# EAGLE board solder_test (EAGLE 7.1.0)
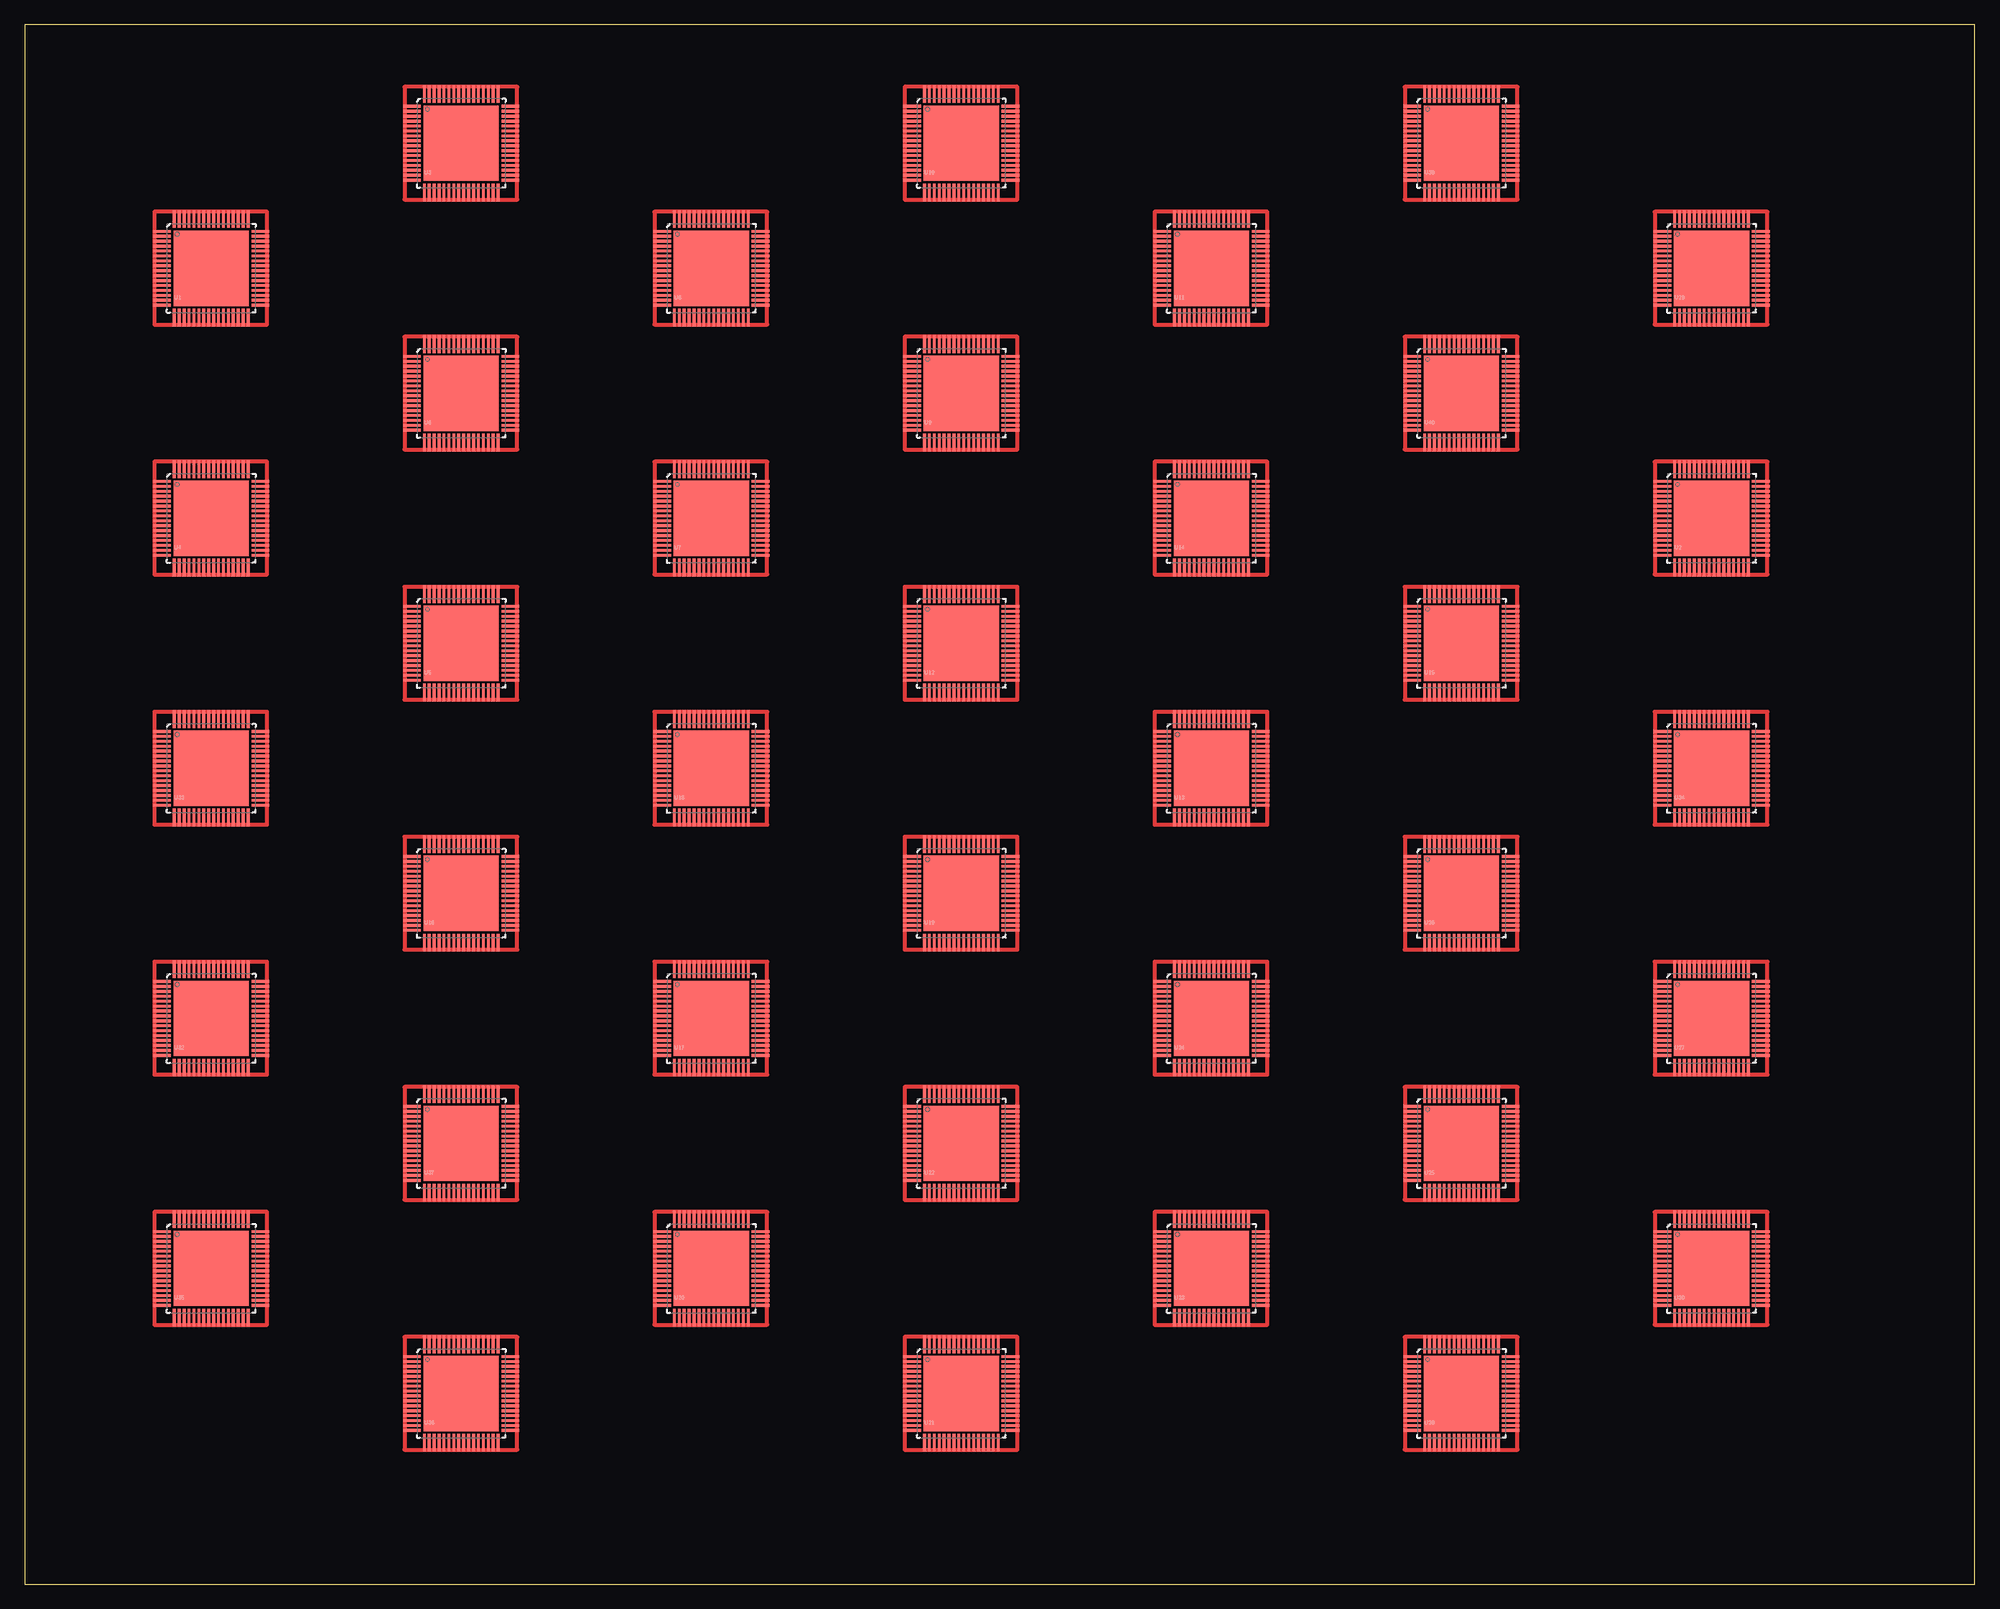
[diagram p0: board, top side]
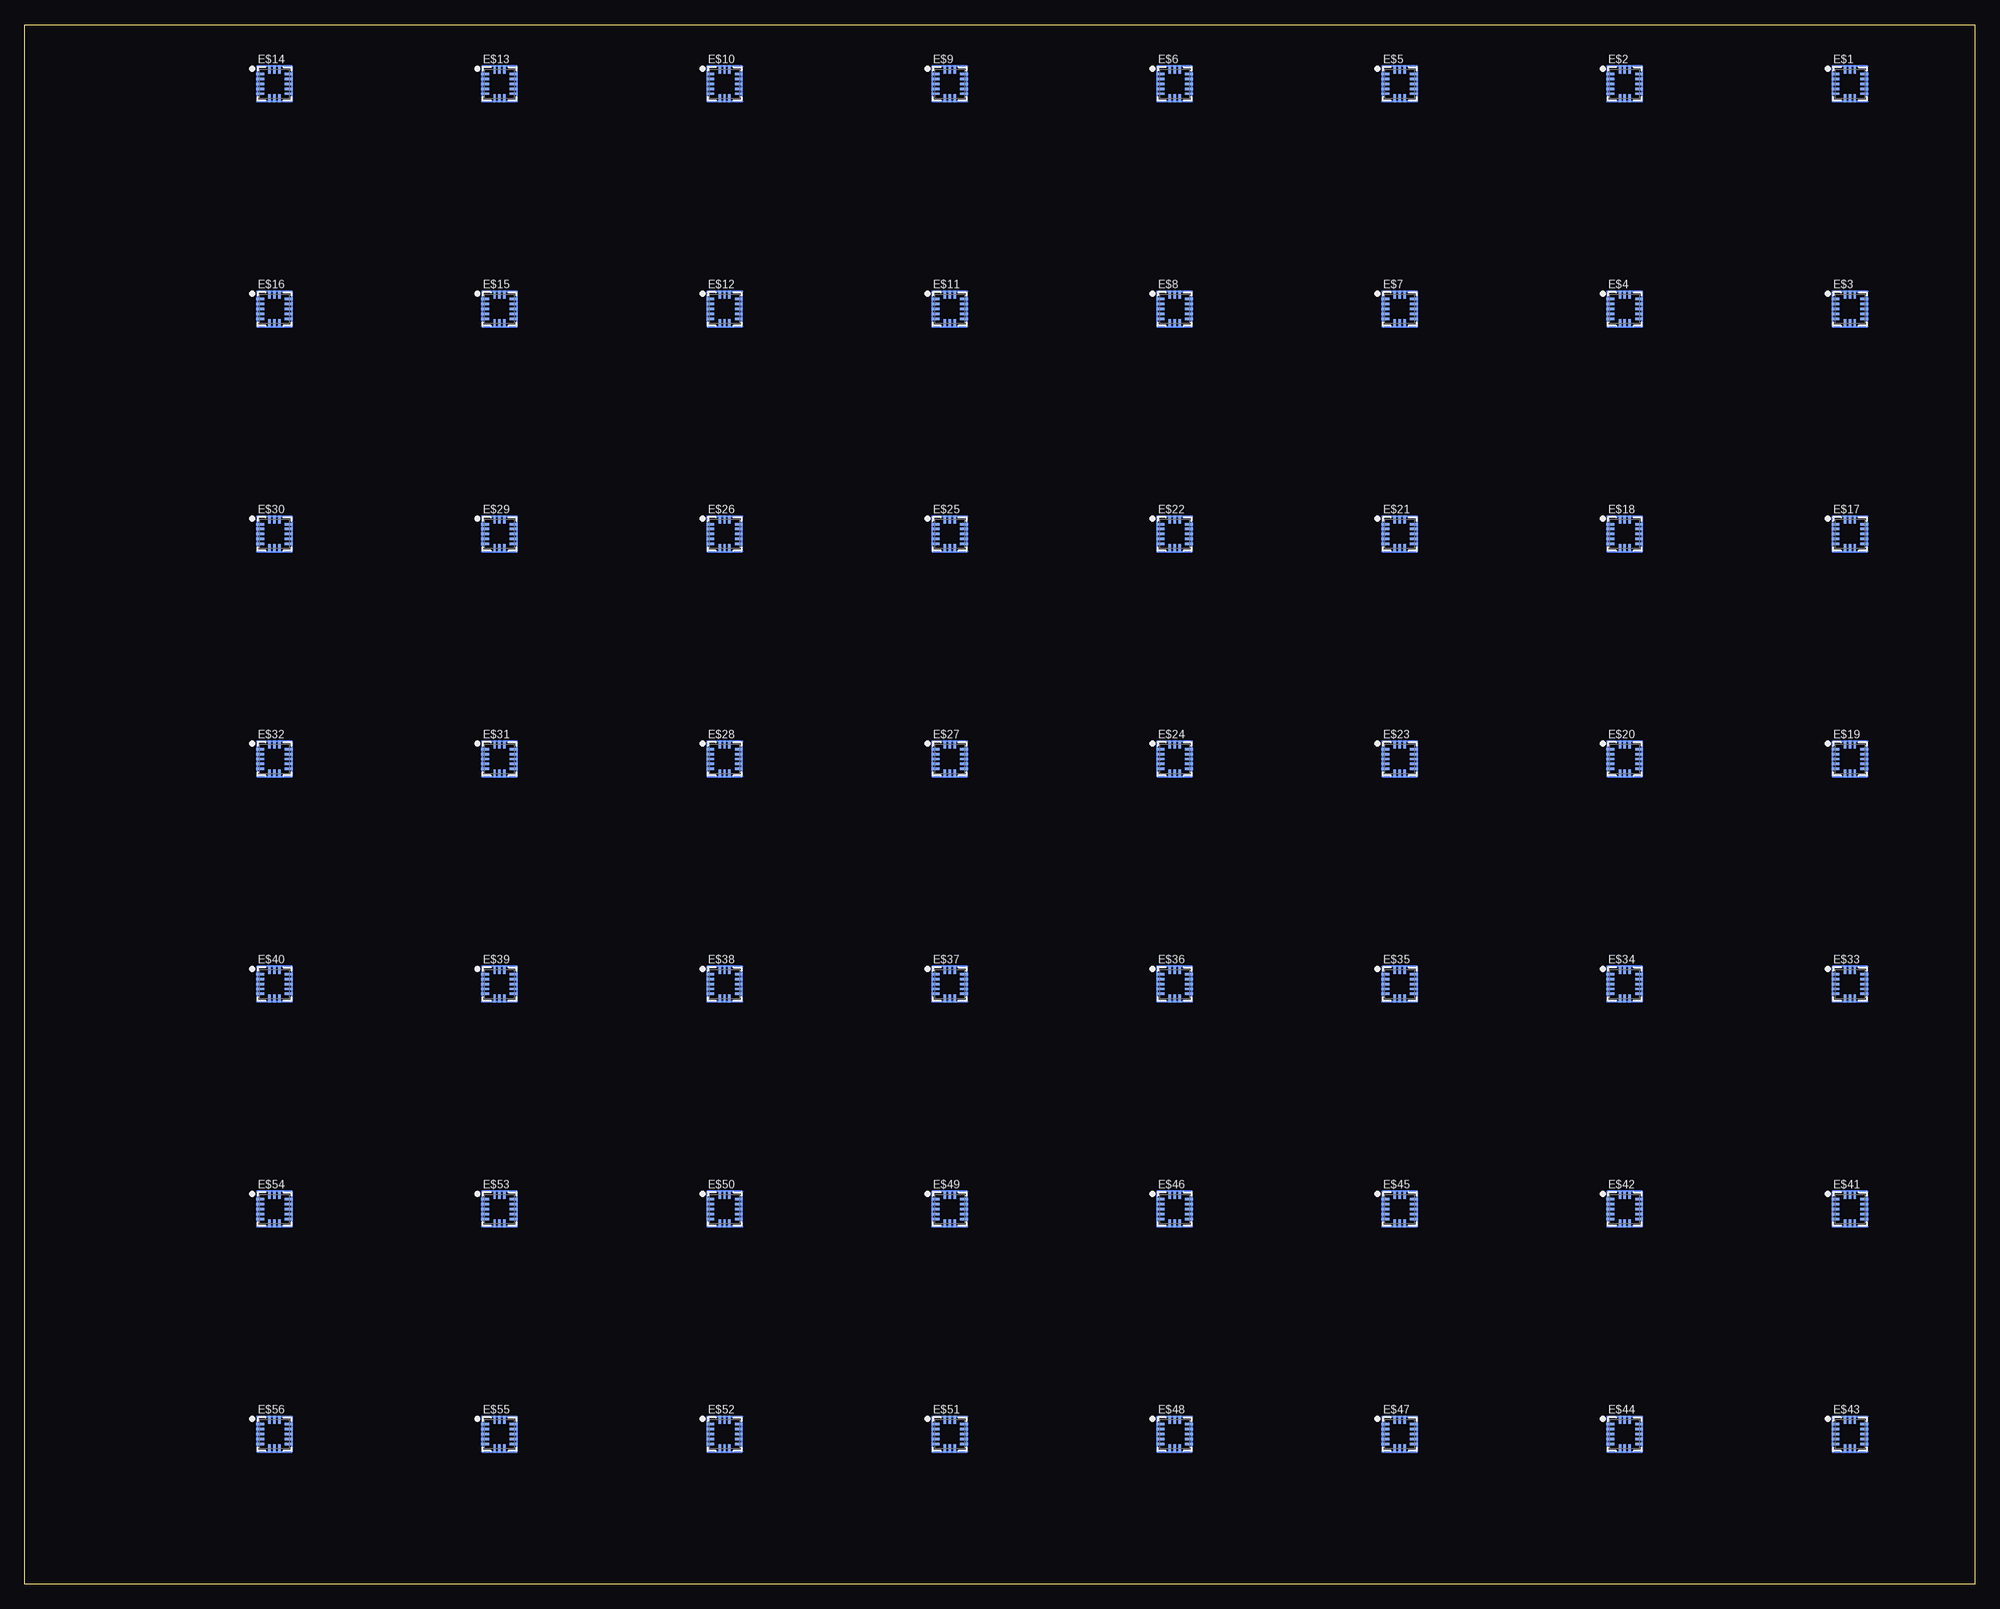
[diagram p1: board, bottom side, seen from below]

Size 198.1 x 158.42 mm. Coordinates in mm from the lower left corner, seen from the top.
Outline: 0,0 198.1,0 198.1,158.42 0,158.42 0,0
Copper layers (1*16): Top 0.035mm / dielectric 1.5mm / Bottom 0.035mm
Design rules "default *": minimum track width 10mil, minimum drill 24mil, track to track 8mil, track to pad 8mil, pad to pad 8mil, via to via 8mil, smd to smd 8mil, copper to edge 40mil, drill to drill 8mil, minimum pad ring 10mil, minimum via ring 8mil, stop-mask expansion 4mil, vias tented up to drill 0mil, thermal gap 10mil
Net classes: 1 RFSIG: width 0.457 mm; 2 VBATT: width 0.762 mm; 3 VMOTOR: width 0.254 mm; 4 GND: width 0.254 mm

## Footprints (pad centres in the part's own frame; a part is rotated, then mirrored left to right if it is on the bottom)
LGA16_3X3MM = smd 0.8 x 0.25: 1 -1.45,1; 2 -1.45,0.5; 3 -1.45,0; 4 -1.45,-0.5; 5 -1.45,-1; 9 1.45,-1; 10 1.45,-0.5; 11 1.45,0; 12 1.45,0.5; 13 1.45,1 | smd 0.25 x 0.8: 6 -0.5,-1.45; 7 0,-1.45; 8 0.5,-1.45; 14 0.5,1.45; 15 0,1.45; 16 -0.5,1.45
QFN-64 = smd 1.8 x 0.28: 1 -5,3.75; 2 -5,3.25; 3 -5,2.75; 4 -5,2.25; 5 -5,1.75; 6 -5,1.25; 7 -5,0.75; 8 -5,0.25; 9 -5,-0.25; 10 -5,-0.75; 11 -5,-1.25; 12 -5,-1.75; 13 -5,-2.25; 14 -5,-2.75; 15 -5,-3.25; 16 -5,-3.75; 33 5,-3.75; 34 5,-3.25; 35 5,-2.75; 36 5,-2.25; 37 5,-1.75; 38 5,-1.25; 39 5,-0.75; 40 5,-0.25; 41 5,0.25; 42 5,0.75; 43 5,1.25; 44 5,1.75; 45 5,2.25; 46 5,2.75; 47 5,3.25; 48 5,3.75 | smd 0.28 x 1.8: 17 -3.75,-5; 18 -3.25,-5; 19 -2.75,-5; 20 -2.25,-5; 21 -1.75,-5; 22 -1.25,-5; 23 -0.75,-5; 24 -0.25,-5; 25 0.25,-5; 26 0.75,-5; 27 1.25,-5; 28 1.75,-5; 29 2.25,-5; 30 2.75,-5; 31 3.25,-5; 32 3.75,-5; 49 3.75,5; 50 3.25,5; 51 2.75,5; 52 2.25,5; 53 1.75,5; 54 1.25,5; 55 0.75,5; 56 0.25,5; 57 -0.25,5; 58 -0.75,5; 59 -1.25,5; 60 -1.75,5; 61 -2.25,5; 62 -2.75,5; 63 -3.25,5; 64 -3.75,5 | smd 7.65 x 7.65: 65 0,0

## Placement (x,y rotation side)
E$1  [LGA16_3X3MM]  12.7,152.4 0 bottom
E$2  [LGA16_3X3MM]  35.56,152.4 0 bottom
E$3  [LGA16_3X3MM]  12.7,129.54 0 bottom
E$4  [LGA16_3X3MM]  35.56,129.54 0 bottom
E$5  [LGA16_3X3MM]  58.42,152.4 0 bottom
E$6  [LGA16_3X3MM]  81.28,152.4 0 bottom
E$7  [LGA16_3X3MM]  58.42,129.54 0 bottom
E$8  [LGA16_3X3MM]  81.28,129.54 0 bottom
E$9  [LGA16_3X3MM]  104.14,152.4 0 bottom
E$10  [LGA16_3X3MM]  127,152.4 0 bottom
E$11  [LGA16_3X3MM]  104.14,129.54 0 bottom
E$12  [LGA16_3X3MM]  127,129.54 0 bottom
E$13  [LGA16_3X3MM]  149.86,152.4 0 bottom
E$14  [LGA16_3X3MM]  172.72,152.4 0 bottom
E$15  [LGA16_3X3MM]  149.86,129.54 0 bottom
E$16  [LGA16_3X3MM]  172.72,129.54 0 bottom
E$17  [LGA16_3X3MM]  12.7,106.68 0 bottom
E$18  [LGA16_3X3MM]  35.56,106.68 0 bottom
E$19  [LGA16_3X3MM]  12.7,83.82 0 bottom
E$20  [LGA16_3X3MM]  35.56,83.82 0 bottom
E$21  [LGA16_3X3MM]  58.42,106.68 0 bottom
E$22  [LGA16_3X3MM]  81.28,106.68 0 bottom
E$23  [LGA16_3X3MM]  58.42,83.82 0 bottom
E$24  [LGA16_3X3MM]  81.28,83.82 0 bottom
E$25  [LGA16_3X3MM]  104.14,106.68 0 bottom
E$26  [LGA16_3X3MM]  127,106.68 0 bottom
E$27  [LGA16_3X3MM]  104.14,83.82 0 bottom
E$28  [LGA16_3X3MM]  127,83.82 0 bottom
E$29  [LGA16_3X3MM]  149.86,106.68 0 bottom
E$30  [LGA16_3X3MM]  172.72,106.68 0 bottom
E$31  [LGA16_3X3MM]  149.86,83.82 0 bottom
E$32  [LGA16_3X3MM]  172.72,83.82 0 bottom
E$33  [LGA16_3X3MM]  12.7,60.96 0 bottom
E$34  [LGA16_3X3MM]  35.56,60.96 0 bottom
E$35  [LGA16_3X3MM]  58.42,60.96 0 bottom
E$36  [LGA16_3X3MM]  81.28,60.96 0 bottom
E$37  [LGA16_3X3MM]  104.14,60.96 0 bottom
E$38  [LGA16_3X3MM]  127,60.96 0 bottom
E$39  [LGA16_3X3MM]  149.86,60.96 0 bottom
E$40  [LGA16_3X3MM]  172.72,60.96 0 bottom
E$41  [LGA16_3X3MM]  12.7,38.1 0 bottom
E$42  [LGA16_3X3MM]  35.56,38.1 0 bottom
E$43  [LGA16_3X3MM]  12.7,15.24 0 bottom
E$44  [LGA16_3X3MM]  35.56,15.24 0 bottom
E$45  [LGA16_3X3MM]  58.42,38.1 0 bottom
E$46  [LGA16_3X3MM]  81.28,38.1 0 bottom
E$47  [LGA16_3X3MM]  58.42,15.24 0 bottom
E$48  [LGA16_3X3MM]  81.28,15.24 0 bottom
E$49  [LGA16_3X3MM]  104.14,38.1 0 bottom
E$50  [LGA16_3X3MM]  127,38.1 0 bottom
E$51  [LGA16_3X3MM]  104.14,15.24 0 bottom
E$52  [LGA16_3X3MM]  127,15.24 0 bottom
E$53  [LGA16_3X3MM]  149.86,38.1 0 bottom
E$54  [LGA16_3X3MM]  172.72,38.1 0 bottom
E$55  [LGA16_3X3MM]  149.86,15.24 0 bottom
E$56  [LGA16_3X3MM]  172.72,15.24 0 bottom
U1  ATMEGA128RFA1  [QFN-64]  18.95,133.67 0 top
U2  ATMEGA128RFA1  [QFN-64]  171.35,108.27 0 top
U3  ATMEGA128RFA1  [QFN-64]  44.35,146.37 0 top
U4  ATMEGA128RFA1  [QFN-64]  18.95,108.27 0 top
U5  ATMEGA128RFA1  [QFN-64]  44.35,95.57 0 top
U6  ATMEGA128RFA1  [QFN-64]  44.35,120.97 0 top
U7  ATMEGA128RFA1  [QFN-64]  69.75,108.27 0 top
U8  ATMEGA128RFA1  [QFN-64]  69.75,133.67 0 top
U9  ATMEGA128RFA1  [QFN-64]  95.15,120.97 0 top
U10  ATMEGA128RFA1  [QFN-64]  95.15,146.37 0 top
U11  ATMEGA128RFA1  [QFN-64]  120.55,133.67 0 top
U12  ATMEGA128RFA1  [QFN-64]  95.15,95.57 0 top
U13  ATMEGA128RFA1  [QFN-64]  120.55,82.87 0 top
U14  ATMEGA128RFA1  [QFN-64]  120.55,108.27 0 top
U15  ATMEGA128RFA1  [QFN-64]  145.95,95.57 0 top
U16  ATMEGA128RFA1  [QFN-64]  44.35,70.17 0 top
U17  ATMEGA128RFA1  [QFN-64]  69.75,57.47 0 top
U18  ATMEGA128RFA1  [QFN-64]  69.75,82.87 0 top
U19  ATMEGA128RFA1  [QFN-64]  95.15,70.17 0 top
U20  ATMEGA128RFA1  [QFN-64]  69.75,32.07 0 top
U21  ATMEGA128RFA1  [QFN-64]  95.15,19.37 0 top
U22  ATMEGA128RFA1  [QFN-64]  95.15,44.77 0 top
U23  ATMEGA128RFA1  [QFN-64]  120.55,32.07 0 top
U24  ATMEGA128RFA1  [QFN-64]  120.55,57.47 0 top
U25  ATMEGA128RFA1  [QFN-64]  145.95,44.77 0 top
U26  ATMEGA128RFA1  [QFN-64]  145.95,70.17 0 top
U27  ATMEGA128RFA1  [QFN-64]  171.35,57.47 0 top
U28  ATMEGA128RFA1  [QFN-64]  145.95,19.37 0 top
U29  ATMEGA128RFA1  [QFN-64]  171.35,133.67 0 top
U30  ATMEGA128RFA1  [QFN-64]  171.35,32.07 0 top
U32  ATMEGA128RFA1  [QFN-64]  18.95,57.47 0 top
U33  ATMEGA128RFA1  [QFN-64]  18.95,82.87 0 top
U34  ATMEGA128RFA1  [QFN-64]  171.35,82.87 0 top
U35  ATMEGA128RFA1  [QFN-64]  18.95,32.07 0 top
U36  ATMEGA128RFA1  [QFN-64]  44.35,19.37 0 top
U37  ATMEGA128RFA1  [QFN-64]  44.35,44.77 0 top
U39  ATMEGA128RFA1  [QFN-64]  145.95,146.37 0 top
U40  ATMEGA128RFA1  [QFN-64]  145.95,120.97 0 top

## Library data of the parts
E$1-E$56 = IMU_parts
U1-U30 U32-U37 U39 U40 = SparkFun-DigitalIC

## Nets
N$1: U1.36
N$2: U1.37
N$3: U1.39
N$4: U1.40
N$5: U1.41
N$6: U1.42
N$7: U1.43
N$8: U1.25
N$9: U1.26
N$10: U1.27
N$11: U1.28
N$12: U1.29
N$13: U1.30
N$14: U1.31
N$15: U1.32
N$16: U1.46
N$17: U1.47
N$18: U1.48
N$19: U1.49
N$20: U1.50
N$21: U1.51
N$22: U1.52
N$23: U1.53
N$24: U1.14
N$25: U1.15
N$26: U1.16
N$27: U1.59
N$28: U1.12
N$29: U1.13
N$30: U1.8
N$31: U1.9
N$32: U1.7
N$33: U1.10
N$34: U1.60
N$35: U1.57
N$36: U1.56
N$37: U1.33
N$38: U1.62
N$39: U1.63
N$40: U1.64
N$41: U1.1
N$42: U1.2
N$43: U1.3
N$44: U1.4
N$45: U1.5
N$46: U1.6
N$47: U1.65
N$48: U1.19
N$49: U1.18
N$50: U1.17
N$51: U2.36
N$52: U2.37
N$53: U2.39
N$54: U2.40
N$55: U2.41
N$56: U2.42
N$57: U2.43
N$58: U2.25
N$59: U2.26
N$60: U2.27
N$61: U2.28
N$62: U2.29
N$63: U2.30
N$64: U2.31
N$65: U2.32
N$66: U2.46
N$67: U2.47
N$68: U2.48
N$69: U2.49
N$70: U2.50
N$71: U2.51
N$72: U2.52
N$73: U2.53
N$74: U2.14
N$75: U2.15
N$76: U2.16
N$77: U2.59
N$78: U2.12
N$79: U2.13
N$80: U2.8
N$81: U2.9
N$82: U2.7
N$83: U2.10
N$84: U2.60
N$85: U2.57
N$86: U2.56
N$87: U2.33
N$88: U2.62
N$89: U2.63
N$90: U2.64
N$91: U2.1
N$92: U2.2
N$93: U2.3
N$94: U2.4
N$95: U2.5
N$96: U2.6
N$97: U2.65
N$98: U2.19
N$99: U2.18
N$100: U2.17
N$101: U3.36
N$102: U3.37
N$103: U3.39
N$104: U3.40
N$105: U3.41
N$106: U3.42
N$107: U3.43
N$108: U3.25
N$109: U3.26
N$110: U3.27
N$111: U3.28
N$112: U3.29
N$113: U3.30
N$114: U3.31
N$115: U3.32
N$116: U3.46
N$117: U3.47
N$118: U3.48
N$119: U3.49
N$120: U3.50
N$121: U3.51
N$122: U3.52
N$123: U3.53
N$124: U3.14
N$125: U3.15
N$126: U3.16
N$127: U3.59
N$128: U3.12
N$129: U3.13
N$130: U3.8
N$131: U3.9
N$132: U3.7
N$133: U3.10
N$134: U3.60
N$135: U3.57
N$136: U3.56
N$137: U3.33
N$138: U3.62
N$139: U3.63
N$140: U3.64
N$141: U3.1
N$142: U3.2
N$143: U3.3
N$144: U3.4
N$145: U3.5
N$146: U3.6
N$147: U3.65
N$148: U3.19
N$149: U3.18
N$150: U3.17
N$151: U4.36
N$152: U4.37
N$153: U4.39
N$154: U4.40
N$155: U4.41
N$156: U4.42
N$157: U4.43
N$158: U4.25
N$159: U4.26
N$160: U4.27
N$161: U4.28
N$162: U4.29
N$163: U4.30
N$164: U4.31
N$165: U4.32
N$166: U4.46
N$167: U4.47
N$168: U4.48
N$169: U4.49
N$170: U4.50
N$171: U4.51
N$172: U4.52
N$173: U4.53
N$174: U4.14
N$175: U4.15
N$176: U4.16
N$177: U4.59
N$178: U4.12
N$179: U4.13
N$180: U4.8
N$181: U4.9
N$182: U4.7
N$183: U4.10
N$184: U4.60
N$185: U4.57
N$186: U4.56
N$187: U4.33
N$188: U4.62
N$189: U4.63
N$190: U4.64
N$191: U4.1
N$192: U4.2
N$193: U4.3
N$194: U4.4
N$195: U4.5
N$196: U4.6
N$197: U4.65
N$198: U4.19
N$199: U4.18
N$200: U4.17
N$201: U5.36
N$202: U5.37
N$203: U5.39
N$204: U5.40
N$205: U5.41
N$206: U5.42
N$207: U5.43
N$208: U5.25
N$209: U5.26
N$210: U5.27
N$211: U5.28
N$212: U5.29
N$213: U5.30
N$214: U5.31
N$215: U5.32
N$216: U5.46
N$217: U5.47
N$218: U5.48
N$219: U5.49
N$220: U5.50
N$221: U5.51
N$222: U5.52
N$223: U5.53
N$224: U5.14
N$225: U5.15
N$226: U5.16
N$227: U5.59
N$228: U5.12
N$229: U5.13
N$230: U5.8
N$231: U5.9
N$232: U5.7
N$233: U5.10
N$234: U5.60
N$235: U5.57
N$236: U5.56
N$237: U5.33
N$238: U5.62
N$239: U5.63
N$240: U5.64
N$241: U5.1
N$242: U5.2
N$243: U5.3
N$244: U5.4
N$245: U5.5
N$246: U5.6
N$247: U5.65
N$248: U5.19
N$249: U5.18
N$250: U5.17
N$251: U6.36
N$252: U6.37
N$253: U6.39
N$254: U6.40
N$255: U6.41
N$256: U6.42
N$257: U6.43
N$258: U6.25
N$259: U6.26
N$260: U6.27
N$261: U6.28
N$262: U6.29
N$263: U6.30
N$264: U6.31
N$265: U6.32
N$266: U6.46
N$267: U6.47
N$268: U6.48
N$269: U6.49
N$270: U6.50
N$271: U6.51
N$272: U6.52
N$273: U6.53
N$274: U6.14
N$275: U6.15
N$276: U6.16
N$277: U6.59
N$278: U6.12
N$279: U6.13
N$280: U6.8
N$281: U6.9
N$282: U6.7
N$283: U6.10
N$284: U6.60
N$285: U6.57
N$286: U6.56
N$287: U6.33
N$288: U6.62
N$289: U6.63
N$290: U6.64
N$291: U6.1
N$292: U6.2
N$293: U6.3
N$294: U6.4
N$295: U6.5
N$296: U6.6
N$297: U6.65
N$298: U6.19
N$299: U6.18
N$300: U6.17
N$301: U7.36
N$302: U7.37
N$303: U7.39
N$304: U7.40
N$305: U7.41
N$306: U7.42
N$307: U7.43
N$308: U7.25
N$309: U7.26
N$310: U7.27
N$311: U7.28
N$312: U7.29
N$313: U7.30
N$314: U7.31
N$315: U7.32
N$316: U7.46
N$317: U7.47
N$318: U7.48
N$319: U7.49
N$320: U7.50
N$321: U7.51
N$322: U7.52
N$323: U7.53
N$324: U7.14
N$325: U7.15
N$326: U7.16
N$327: U7.59
N$328: U7.12
N$329: U7.13
N$330: U7.8
N$331: U7.9
N$332: U7.7
N$333: U7.10
N$334: U7.60
N$335: U7.57
N$336: U7.56
N$337: U7.33
N$338: U7.62
N$339: U7.63
N$340: U7.64
N$341: U7.1
N$342: U7.2
N$343: U7.3
N$344: U7.4
N$345: U7.5
N$346: U7.6
N$347: U7.65
N$348: U7.19
N$349: U7.18
N$350: U7.17
N$351: U8.36
N$352: U8.37
N$353: U8.39
N$354: U8.40
N$355: U8.41
N$356: U8.42
N$357: U8.43
N$358: U8.25
N$359: U8.26
N$360: U8.27
N$361: U8.28
N$362: U8.29
N$363: U8.30
N$364: U8.31
N$365: U8.32
N$366: U8.46
N$367: U8.47
N$368: U8.48
N$369: U8.49
N$370: U8.50
N$371: U8.51
N$372: U8.52
N$373: U8.53
N$374: U8.14
N$375: U8.15
N$376: U8.16
N$377: U8.59
N$378: U8.12
N$379: U8.13
N$380: U8.8
N$381: U8.9
N$382: U8.7
N$383: U8.10
N$384: U8.60
N$385: U8.57
N$386: U8.56
N$387: U8.33
N$388: U8.62
N$389: U8.63
N$390: U8.64
N$391: U8.1
N$392: U8.2
N$393: U8.3
N$394: U8.4
N$395: U8.5
N$396: U8.6
N$397: U8.65
N$398: U8.19
N$399: U8.18
N$400: U8.17
N$401: U9.36
N$402: U9.37
N$403: U9.39
N$404: U9.40
N$405: U9.41
N$406: U9.42
N$407: U9.43
N$408: U9.25
N$409: U9.26
N$410: U9.27
N$411: U9.28
N$412: U9.29
N$413: U9.30
N$414: U9.31
N$415: U9.32
N$416: U9.46
N$417: U9.47
N$418: U9.48
N$419: U9.49
N$420: U9.50
N$421: U9.51
N$422: U9.52
N$423: U9.53
N$424: U9.14
N$425: U9.15
N$426: U9.16
N$427: U9.59
N$428: U9.12
N$429: U9.13
N$430: U9.8
N$431: U9.9
N$432: U9.7
N$433: U9.10
N$434: U9.60
N$435: U9.57
N$436: U9.56
N$437: U9.33
N$438: U9.62
N$439: U9.63
N$440: U9.64
N$441: U9.1
N$442: U9.2
N$443: U9.3
N$444: U9.4
N$445: U9.5
N$446: U9.6
N$447: U9.65
N$448: U9.19
N$449: U9.18
N$450: U9.17
N$451: U10.36
N$452: U10.37
N$453: U10.39
N$454: U10.40
N$455: U10.41
N$456: U10.42
N$457: U10.43
N$458: U10.25
N$459: U10.26
N$460: U10.27
N$461: U10.28
N$462: U10.29
N$463: U10.30
N$464: U10.31
N$465: U10.32
N$466: U10.46
N$467: U10.47
N$468: U10.48
N$469: U10.49
N$470: U10.50
N$471: U10.51
N$472: U10.52
N$473: U10.53
N$474: U10.14
N$475: U10.15
N$476: U10.16
N$477: U10.59
N$478: U10.12
N$479: U10.13
N$480: U10.8
N$481: U10.9
N$482: U10.7
N$483: U10.10
N$484: U10.60
N$485: U10.57
N$486: U10.56
N$487: U10.33
N$488: U10.62
N$489: U10.63
N$490: U10.64
N$491: U10.1
N$492: U10.2
N$493: U10.3
N$494: U10.4
N$495: U10.5
N$496: U10.6
N$497: U10.65
N$498: U10.19
N$499: U10.18
N$500: U10.17
N$501: U11.36
N$502: U11.37
N$503: U11.39
N$504: U11.40
N$505: U11.41
N$506: U11.42
N$507: U11.43
N$508: U11.25
N$509: U11.26
N$510: U11.27
N$511: U11.28
N$512: U11.29
N$513: U11.30
N$514: U11.31
N$515: U11.32
N$516: U11.46
N$517: U11.47
N$518: U11.48
N$519: U11.49
N$520: U11.50
N$521: U11.51
N$522: U11.52
N$523: U11.53
N$524: U11.14
N$525: U11.15
N$526: U11.16
N$527: U11.59
N$528: U11.12
N$529: U11.13
N$530: U11.8
N$531: U11.9
N$532: U11.7
N$533: U11.10
N$534: U11.60
N$535: U11.57
N$536: U11.56
N$537: U11.33
N$538: U11.62
N$539: U11.63
N$540: U11.64
N$541: U11.1
N$542: U11.2
N$543: U11.3
N$544: U11.4
N$545: U11.5
N$546: U11.6
N$547: U11.65
N$548: U11.19
N$549: U11.18
N$550: U11.17
N$551: U12.36
N$552: U12.37
N$553: U12.39
N$554: U12.40
N$555: U12.41
N$556: U12.42
N$557: U12.43
N$558: U12.25
N$559: U12.26
N$560: U12.27
N$561: U12.28
N$562: U12.29
N$563: U12.30
N$564: U12.31
N$565: U12.32
N$566: U12.46
N$567: U12.47
N$568: U12.48
N$569: U12.49
N$570: U12.50
N$571: U12.51
N$572: U12.52
N$573: U12.53
N$574: U12.14
N$575: U12.15
N$576: U12.16
N$577: U12.59
N$578: U12.12
N$579: U12.13
N$580: U12.8
N$581: U12.9
N$582: U12.7
N$583: U12.10
N$584: U12.60
N$585: U12.57
N$586: U12.56
N$587: U12.33
N$588: U12.62
N$589: U12.63
N$590: U12.64
N$591: U12.1
N$592: U12.2
N$593: U12.3
N$594: U12.4
N$595: U12.5
N$596: U12.6
N$597: U12.65
N$598: U12.19
N$599: U12.18
N$600: U12.17
N$601: U13.36
N$602: U13.37
N$603: U13.39
N$604: U13.40
N$605: U13.41
N$606: U13.42
N$607: U13.43
N$608: U13.25
N$609: U13.26
N$610: U13.27
N$611: U13.28
N$612: U13.29
N$613: U13.30
N$614: U13.31
N$615: U13.32
N$616: U13.46
N$617: U13.47
N$618: U13.48
N$619: U13.49
N$620: U13.50
N$621: U13.51
N$622: U13.52
N$623: U13.53
N$624: U13.14
N$625: U13.15
N$626: U13.16
N$627: U13.59
N$628: U13.12
N$629: U13.13
N$630: U13.8
N$631: U13.9
N$632: U13.7
N$633: U13.10
N$634: U13.60
N$635: U13.57
N$636: U13.56
N$637: U13.33
N$638: U13.62
N$639: U13.63
N$640: U13.64
N$641: U13.1
N$642: U13.2
N$643: U13.3
N$644: U13.4
N$645: U13.5
N$646: U13.6
N$647: U13.65
N$648: U13.19
N$649: U13.18
N$650: U13.17
N$651: U14.36
N$652: U14.37
N$653: U14.39
N$654: U14.40
N$655: U14.41
N$656: U14.42
N$657: U14.43
N$658: U14.25
N$659: U14.26
N$660: U14.27
N$661: U14.28
N$662: U14.29
N$663: U14.30
N$664: U14.31
N$665: U14.32
N$666: U14.46
N$667: U14.47
N$668: U14.48
N$669: U14.49
N$670: U14.50
N$671: U14.51
N$672: U14.52
N$673: U14.53
N$674: U14.14
N$675: U14.15
N$676: U14.16
N$677: U14.59
N$678: U14.12
N$679: U14.13
N$680: U14.8
N$681: U14.9
N$682: U14.7
N$683: U14.10
N$684: U14.60
N$685: U14.57
N$686: U14.56
N$687: U14.33
N$688: U14.62
N$689: U14.63
N$690: U14.64
N$691: U14.1
N$692: U14.2
N$693: U14.3
N$694: U14.4
N$695: U14.5
N$696: U14.6
N$697: U14.65
N$698: U14.19
N$699: U14.18
N$700: U14.17
N$701: U15.36
N$702: U15.37
N$703: U15.39
N$704: U15.40
N$705: U15.41
N$706: U15.42
N$707: U15.43
N$708: U15.25
N$709: U15.26
N$710: U15.27
N$711: U15.28
N$712: U15.29
N$713: U15.30
N$714: U15.31
N$715: U15.32
N$716: U15.46
N$717: U15.47
N$718: U15.48
N$719: U15.49
N$720: U15.50
N$721: U15.51
N$722: U15.52
N$723: U15.53
N$724: U15.14
N$725: U15.15
N$726: U15.16
N$727: U15.59
N$728: U15.12
N$729: U15.13
N$730: U15.8
N$731: U15.9
N$732: U15.7
N$733: U15.10
N$734: U15.60
N$735: U15.57
N$736: U15.56
N$737: U15.33
N$738: U15.62
N$739: U15.63
N$740: U15.64
N$741: U15.1
N$742: U15.2
N$743: U15.3
N$744: U15.4
N$745: U15.5
N$746: U15.6
N$747: U15.65
N$748: U15.19
N$749: U15.18
N$750: U15.17
N$751: U16.36
N$752: U16.37
N$753: U16.39
N$754: U16.40
N$755: U16.41
N$756: U16.42
N$757: U16.43
N$758: U16.25
N$759: U16.26
N$760: U16.27
N$761: U16.28
N$762: U16.29
N$763: U16.30
N$764: U16.31
N$765: U16.32
N$766: U16.46
N$767: U16.47
N$768: U16.48
N$769: U16.49
N$770: U16.50
N$771: U16.51
N$772: U16.52
N$773: U16.53
N$774: U16.14
N$775: U16.15
N$776: U16.16
N$777: U16.59
N$778: U16.12
N$779: U16.13
N$780: U16.8
N$781: U16.9
N$782: U16.7
N$783: U16.10
N$784: U16.60
N$785: U16.57
N$786: U16.56
N$787: U16.33
N$788: U16.62
N$789: U16.63
N$790: U16.64
N$791: U16.1
N$792: U16.2
N$793: U16.3
N$794: U16.4
N$795: U16.5
N$796: U16.6
N$797: U16.65
N$798: U16.19
N$799: U16.18
N$800: U16.17
N$801: U17.36
N$802: U17.37
N$803: U17.39
N$804: U17.40
N$805: U17.41
N$806: U17.42
N$807: U17.43
N$808: U17.25
N$809: U17.26
N$810: U17.27
N$811: U17.28
N$812: U17.29
N$813: U17.30
N$814: U17.31
N$815: U17.32
N$816: U17.46
N$817: U17.47
N$818: U17.48
N$819: U17.49
N$820: U17.50
N$821: U17.51
N$822: U17.52
N$823: U17.53
N$824: U17.14
N$825: U17.15
N$826: U17.16
N$827: U17.59
N$828: U17.12
N$829: U17.13
N$830: U17.8
N$831: U17.9
N$832: U17.7
N$833: U17.10
N$834: U17.60
N$835: U17.57
N$836: U17.56
N$837: U17.33
N$838: U17.62
N$839: U17.63
N$840: U17.64
N$841: U17.1
N$842: U17.2
N$843: U17.3
N$844: U17.4
N$845: U17.5
N$846: U17.6
N$847: U17.65
N$848: U17.19
N$849: U17.18
N$850: U17.17
N$851: U18.36
N$852: U18.37
N$853: U18.39
N$854: U18.40
N$855: U18.41
N$856: U18.42
N$857: U18.43
N$858: U18.25
N$859: U18.26
N$860: U18.27
N$861: U18.28
N$862: U18.29
N$863: U18.30
N$864: U18.31
N$865: U18.32
N$866: U18.46
N$867: U18.47
N$868: U18.48
N$869: U18.49
N$870: U18.50
N$871: U18.51
N$872: U18.52
N$873: U18.53
N$874: U18.14
N$875: U18.15
N$876: U18.16
N$877: U18.59
N$878: U18.12
N$879: U18.13
N$880: U18.8
N$881: U18.9
N$882: U18.7
N$883: U18.10
N$884: U18.60
N$885: U18.57
N$886: U18.56
N$887: U18.33
N$888: U18.62
N$889: U18.63
N$890: U18.64
N$891: U18.1
N$892: U18.2
N$893: U18.3
N$894: U18.4
N$895: U18.5
N$896: U18.6
N$897: U18.65
N$898: U18.19
N$899: U18.18
N$900: U18.17
N$901: U19.36
N$902: U19.37
N$903: U19.39
N$904: U19.40
N$905: U19.41
N$906: U19.42
N$907: U19.43
N$908: U19.25
N$909: U19.26
N$910: U19.27
N$911: U19.28
N$912: U19.29
N$913: U19.30
N$914: U19.31
N$915: U19.32
N$916: U19.46
N$917: U19.47
N$918: U19.48
N$919: U19.49
N$920: U19.50
N$921: U19.51
N$922: U19.52
N$923: U19.53
N$924: U19.14
N$925: U19.15
N$926: U19.16
N$927: U19.59
N$928: U19.12
N$929: U19.13
N$930: U19.8
N$931: U19.9
N$932: U19.7
N$933: U19.10
N$934: U19.60
N$935: U19.57
N$936: U19.56
N$937: U19.33
N$938: U19.62
N$939: U19.63
N$940: U19.64
N$941: U19.1
N$942: U19.2
N$943: U19.3
N$944: U19.4
N$945: U19.5
N$946: U19.6
N$947: U19.65
N$948: U19.19
N$949: U19.18
N$950: U19.17
N$951: U20.36
N$952: U20.37
N$953: U20.39
N$954: U20.40
N$955: U20.41
N$956: U20.42
N$957: U20.43
N$958: U20.25
N$959: U20.26
N$960: U20.27
N$961: U20.28
N$962: U20.29
N$963: U20.30
N$964: U20.31
N$965: U20.32
N$966: U20.46
N$967: U20.47
N$968: U20.48
N$969: U20.49
N$970: U20.50
N$971: U20.51
N$972: U20.52
N$973: U20.53
N$974: U20.14
N$975: U20.15
N$976: U20.16
N$977: U20.59
N$978: U20.12
N$979: U20.13
N$980: U20.8
N$981: U20.9
N$982: U20.7
N$983: U20.10
N$984: U20.60
N$985: U20.57
N$986: U20.56
N$987: U20.33
N$988: U20.62
N$989: U20.63
N$990: U20.64
N$991: U20.1
N$992: U20.2
N$993: U20.3
N$994: U20.4
N$995: U20.5
N$996: U20.6
N$997: U20.65
N$998: U20.19
N$999: U20.18
N$1000: U20.17
N$1001: U21.36
N$1002: U21.37
N$1003: U21.39
N$1004: U21.40
N$1005: U21.41
N$1006: U21.42
N$1007: U21.43
N$1008: U21.25
N$1009: U21.26
N$1010: U21.27
N$1011: U21.28
N$1012: U21.29
N$1013: U21.30
N$1014: U21.31
N$1015: U21.32
N$1016: U21.46
N$1017: U21.47
N$1018: U21.48
N$1019: U21.49
N$1020: U21.50
N$1021: U21.51
N$1022: U21.52
N$1023: U21.53
N$1024: U21.14
N$1025: U21.15
N$1026: U21.16
N$1027: U21.59
N$1028: U21.12
N$1029: U21.13
N$1030: U21.8
N$1031: U21.9
N$1032: U21.7
N$1033: U21.10
N$1034: U21.60
N$1035: U21.57
N$1036: U21.56
N$1037: U21.33
N$1038: U21.62
N$1039: U21.63
N$1040: U21.64
N$1041: U21.1
N$1042: U21.2
N$1043: U21.3
N$1044: U21.4
N$1045: U21.5
N$1046: U21.6
N$1047: U21.65
N$1048: U21.19
N$1049: U21.18
N$1050: U21.17
N$1051: U22.36
N$1052: U22.37
N$1053: U22.39
N$1054: U22.40
N$1055: U22.41
N$1056: U22.42
N$1057: U22.43
N$1058: U22.25
N$1059: U22.26
N$1060: U22.27
N$1061: U22.28
N$1062: U22.29
N$1063: U22.30
N$1064: U22.31
N$1065: U22.32
N$1066: U22.46
N$1067: U22.47
N$1068: U22.48
N$1069: U22.49
N$1070: U22.50
N$1071: U22.51
N$1072: U22.52
N$1073: U22.53
N$1074: U22.14
N$1075: U22.15
N$1076: U22.16
N$1077: U22.59
N$1078: U22.12
N$1079: U22.13
N$1080: U22.8
N$1081: U22.9
N$1082: U22.7
N$1083: U22.10
N$1084: U22.60
N$1085: U22.57
N$1086: U22.56
N$1087: U22.33
N$1088: U22.62
N$1089: U22.63
N$1090: U22.64
N$1091: U22.1
N$1092: U22.2
N$1093: U22.3
N$1094: U22.4
N$1095: U22.5
N$1096: U22.6
N$1097: U22.65
N$1098: U22.19
N$1099: U22.18
N$1100: U22.17
N$1101: U23.36
N$1102: U23.37
N$1103: U23.39
N$1104: U23.40
N$1105: U23.41
N$1106: U23.42
N$1107: U23.43
N$1108: U23.25
N$1109: U23.26
N$1110: U23.27
N$1111: U23.28
N$1112: U23.29
N$1113: U23.30
N$1114: U23.31
N$1115: U23.32
N$1116: U23.46
N$1117: U23.47
N$1118: U23.48
N$1119: U23.49
N$1120: U23.50
N$1121: U23.51
N$1122: U23.52
N$1123: U23.53
N$1124: U23.14
N$1125: U23.15
N$1126: U23.16
N$1127: U23.59
N$1128: U23.12
N$1129: U23.13
N$1130: U23.8
N$1131: U23.9
N$1132: U23.7
N$1133: U23.10
N$1134: U23.60
N$1135: U23.57
N$1136: U23.56
N$1137: U23.33
N$1138: U23.62
N$1139: U23.63
N$1140: U23.64
N$1141: U23.1
N$1142: U23.2
N$1143: U23.3
N$1144: U23.4
N$1145: U23.5
N$1146: U23.6
N$1147: U23.65
N$1148: U23.19
N$1149: U23.18
N$1150: U23.17
N$1151: U24.36
N$1152: U24.37
N$1153: U24.39
N$1154: U24.40
N$1155: U24.41
N$1156: U24.42
N$1157: U24.43
N$1158: U24.25
N$1159: U24.26
N$1160: U24.27
N$1161: U24.28
N$1162: U24.29
N$1163: U24.30
N$1164: U24.31
N$1165: U24.32
N$1166: U24.46
N$1167: U24.47
N$1168: U24.48
N$1169: U24.49
N$1170: U24.50
N$1171: U24.51
N$1172: U24.52
N$1173: U24.53
N$1174: U24.14
N$1175: U24.15
N$1176: U24.16
N$1177: U24.59
N$1178: U24.12
N$1179: U24.13
N$1180: U24.8
N$1181: U24.9
N$1182: U24.7
N$1183: U24.10
N$1184: U24.60
N$1185: U24.57
N$1186: U24.56
N$1187: U24.33
N$1188: U24.62
N$1189: U24.63
N$1190: U24.64
N$1191: U24.1
N$1192: U24.2
N$1193: U24.3
N$1194: U24.4
N$1195: U24.5
N$1196: U24.6
N$1197: U24.65
N$1198: U24.19
N$1199: U24.18
N$1200: U24.17
N$1201: U25.36
N$1202: U25.37
N$1203: U25.39
N$1204: U25.40
N$1205: U25.41
N$1206: U25.42
N$1207: U25.43
N$1208: U25.25
N$1209: U25.26
N$1210: U25.27
N$1211: U25.28
N$1212: U25.29
N$1213: U25.30
N$1214: U25.31
N$1215: U25.32
N$1216: U25.46
N$1217: U25.47
N$1218: U25.48
N$1219: U25.49
N$1220: U25.50
N$1221: U25.51
N$1222: U25.52
N$1223: U25.53
N$1224: U25.14
N$1225: U25.15
N$1226: U25.16
N$1227: U25.59
N$1228: U25.12
N$1229: U25.13
N$1230: U25.8
N$1231: U25.9
N$1232: U25.7
N$1233: U25.10
N$1234: U25.60
N$1235: U25.57
N$1236: U25.56
N$1237: U25.33
N$1238: U25.62
N$1239: U25.63
N$1240: U25.64
N$1241: U25.1
N$1242: U25.2
N$1243: U25.3
N$1244: U25.4
N$1245: U25.5
N$1246: U25.6
N$1247: U25.65
N$1248: U25.19
N$1249: U25.18
N$1250: U25.17
N$1251: U26.36
N$1252: U26.37
N$1253: U26.39
N$1254: U26.40
N$1255: U26.41
N$1256: U26.42
N$1257: U26.43
N$1258: U26.25
N$1259: U26.26
N$1260: U26.27
N$1261: U26.28
N$1262: U26.29
N$1263: U26.30
N$1264: U26.31
N$1265: U26.32
N$1266: U26.46
N$1267: U26.47
N$1268: U26.48
N$1269: U26.49
N$1270: U26.50
N$1271: U26.51
N$1272: U26.52
N$1273: U26.53
N$1274: U26.14
N$1275: U26.15
N$1276: U26.16
N$1277: U26.59
N$1278: U26.12
N$1279: U26.13
N$1280: U26.8
N$1281: U26.9
N$1282: U26.7
N$1283: U26.10
N$1284: U26.60
N$1285: U26.57
N$1286: U26.56
N$1287: U26.33
N$1288: U26.62
N$1289: U26.63
N$1290: U26.64
N$1291: U26.1
N$1292: U26.2
N$1293: U26.3
N$1294: U26.4
N$1295: U26.5
N$1296: U26.6
N$1297: U26.65
N$1298: U26.19
N$1299: U26.18
N$1300: U26.17
N$1301: U27.36
N$1302: U27.37
N$1303: U27.39
N$1304: U27.40
N$1305: U27.41
N$1306: U27.42
N$1307: U27.43
N$1308: U27.25
N$1309: U27.26
N$1310: U27.27
N$1311: U27.28
N$1312: U27.29
N$1313: U27.30
N$1314: U27.31
N$1315: U27.32
N$1316: U27.46
N$1317: U27.47
N$1318: U27.48
N$1319: U27.49
N$1320: U27.50
N$1321: U27.51
N$1322: U27.52
N$1323: U27.53
N$1324: U27.14
N$1325: U27.15
N$1326: U27.16
N$1327: U27.59
N$1328: U27.12
N$1329: U27.13
N$1330: U27.8
N$1331: U27.9
N$1332: U27.7
N$1333: U27.10
N$1334: U27.60
N$1335: U27.57
N$1336: U27.56
N$1337: U27.33
N$1338: U27.62
N$1339: U27.63
N$1340: U27.64
N$1341: U27.1
N$1342: U27.2
N$1343: U27.3
N$1344: U27.4
N$1345: U27.5
N$1346: U27.6
N$1347: U27.65
N$1348: U27.19
N$1349: U27.18
N$1350: U27.17
N$1351: U28.36
N$1352: U28.37
N$1353: U28.39
N$1354: U28.40
N$1355: U28.41
N$1356: U28.42
N$1357: U28.43
N$1358: U28.25
N$1359: U28.26
N$1360: U28.27
N$1361: U28.28
N$1362: U28.29
N$1363: U28.30
N$1364: U28.31
N$1365: U28.32
N$1366: U28.46
N$1367: U28.47
N$1368: U28.48
N$1369: U28.49
N$1370: U28.50
N$1371: U28.51
N$1372: U28.52
N$1373: U28.53
N$1374: U28.14
N$1375: U28.15
N$1376: U28.16
N$1377: U28.59
N$1378: U28.12
N$1379: U28.13
N$1380: U28.8
N$1381: U28.9
N$1382: U28.7
N$1383: U28.10
N$1384: U28.60
N$1385: U28.57
N$1386: U28.56
N$1387: U28.33
N$1388: U28.62
N$1389: U28.63
N$1390: U28.64
N$1391: U28.1
N$1392: U28.2
N$1393: U28.3
N$1394: U28.4
N$1395: U28.5
N$1396: U28.6
N$1397: U28.65
N$1398: U28.19
N$1399: U28.18
N$1400: U28.17
N$1401: U29.36
N$1402: U29.37
N$1403: U29.39
N$1404: U29.40
N$1405: U29.41
N$1406: U29.42
N$1407: U29.43
N$1408: U29.25
N$1409: U29.26
N$1410: U29.27
N$1411: U29.28
N$1412: U29.29
N$1413: U29.30
N$1414: U29.31
N$1415: U29.32
N$1416: U29.46
N$1417: U29.47
N$1418: U29.48
N$1419: U29.49
N$1420: U29.50
N$1421: U29.51
N$1422: U29.52
N$1423: U29.53
N$1424: U29.14
N$1425: U29.15
N$1426: U29.16
N$1427: U29.59
N$1428: U29.12
N$1429: U29.13
N$1430: U29.8
N$1431: U29.9
N$1432: U29.7
N$1433: U29.10
N$1434: U29.60
N$1435: U29.57
N$1436: U29.56
N$1437: U29.33
N$1438: U29.62
N$1439: U29.63
N$1440: U29.64
N$1441: U29.1
N$1442: U29.2
N$1443: U29.3
N$1444: U29.4
N$1445: U29.5
N$1446: U29.6
N$1447: U29.65
N$1448: U29.19
N$1449: U29.18
N$1450: U29.17
N$1451: U30.36
N$1452: U30.37
N$1453: U30.39
N$1454: U30.40
N$1455: U30.41
N$1456: U30.42
N$1457: U30.43
N$1458: U30.25
N$1459: U30.26
N$1460: U30.27
N$1461: U30.28
N$1462: U30.29
N$1463: U30.30
N$1464: U30.31
N$1465: U30.32
N$1466: U30.46
N$1467: U30.47
N$1468: U30.48
N$1469: U30.49
N$1470: U30.50
N$1471: U30.51
N$1472: U30.52
N$1473: U30.53
N$1474: U30.14
N$1475: U30.15
N$1476: U30.16
N$1477: U30.59
N$1478: U30.12
N$1479: U30.13
N$1480: U30.8
N$1481: U30.9
N$1482: U30.7
N$1483: U30.10
N$1484: U30.60
N$1485: U30.57
N$1486: U30.56
N$1487: U30.33
N$1488: U30.62
N$1489: U30.63
N$1490: U30.64
N$1491: U30.1
N$1492: U30.2
N$1493: U30.3
N$1494: U30.4
N$1495: U30.5
N$1496: U30.6
N$1497: U30.65
N$1498: U30.19
N$1499: U30.18
N$1500: U30.17
N$1551: U32.36
N$1552: U32.37
N$1553: U32.39
N$1554: U32.40
N$1555: U32.41
N$1556: U32.42
N$1557: U32.43
N$1558: U32.25
N$1559: U32.26
N$1560: U32.27
N$1561: U32.28
N$1562: U32.29
N$1563: U32.30
N$1564: U32.31
N$1565: U32.32
N$1566: U32.46
N$1567: U32.47
N$1568: U32.48
N$1569: U32.49
N$1570: U32.50
N$1571: U32.51
N$1572: U32.52
N$1573: U32.53
N$1574: U32.14
N$1575: U32.15
N$1576: U32.16
N$1577: U32.59
N$1578: U32.12
N$1579: U32.13
N$1580: U32.8
N$1581: U32.9
N$1582: U32.7
N$1583: U32.10
N$1584: U32.60
N$1585: U32.57
N$1586: U32.56
N$1587: U32.33
N$1588: U32.62
N$1589: U32.63
N$1590: U32.64
N$1591: U32.1
N$1592: U32.2
N$1593: U32.3
N$1594: U32.4
N$1595: U32.5
N$1596: U32.6
N$1597: U32.65
N$1598: U32.19
N$1599: U32.18
N$1600: U32.17
N$1601: U33.36
N$1602: U33.37
N$1603: U33.39
N$1604: U33.40
N$1605: U33.41
N$1606: U33.42
N$1607: U33.43
N$1608: U33.25
N$1609: U33.26
N$1610: U33.27
N$1611: U33.28
N$1612: U33.29
N$1613: U33.30
N$1614: U33.31
N$1615: U33.32
N$1616: U33.46
N$1617: U33.47
N$1618: U33.48
N$1619: U33.49
N$1620: U33.50
N$1621: U33.51
N$1622: U33.52
N$1623: U33.53
N$1624: U33.14
N$1625: U33.15
N$1626: U33.16
N$1627: U33.59
N$1628: U33.12
N$1629: U33.13
N$1630: U33.8
N$1631: U33.9
N$1632: U33.7
N$1633: U33.10
N$1634: U33.60
N$1635: U33.57
N$1636: U33.56
N$1637: U33.33
N$1638: U33.62
N$1639: U33.63
N$1640: U33.64
N$1641: U33.1
N$1642: U33.2
N$1643: U33.3
N$1644: U33.4
N$1645: U33.5
N$1646: U33.6
N$1647: U33.65
N$1648: U33.19
N$1649: U33.18
N$1650: U33.17
N$1651: U34.36
N$1652: U34.37
N$1653: U34.39
N$1654: U34.40
N$1655: U34.41
N$1656: U34.42
N$1657: U34.43
N$1658: U34.25
N$1659: U34.26
N$1660: U34.27
N$1661: U34.28
N$1662: U34.29
N$1663: U34.30
N$1664: U34.31
N$1665: U34.32
N$1666: U34.46
N$1667: U34.47
N$1668: U34.48
N$1669: U34.49
N$1670: U34.50
N$1671: U34.51
N$1672: U34.52
N$1673: U34.53
N$1674: U34.14
N$1675: U34.15
N$1676: U34.16
N$1677: U34.59
N$1678: U34.12
N$1679: U34.13
N$1680: U34.8
N$1681: U34.9
N$1682: U34.7
N$1683: U34.10
N$1684: U34.60
N$1685: U34.57
N$1686: U34.56
N$1687: U34.33
N$1688: U34.62
N$1689: U34.63
N$1690: U34.64
N$1691: U34.1
N$1692: U34.2
N$1693: U34.3
N$1694: U34.4
N$1695: U34.5
N$1696: U34.6
N$1697: U34.65
N$1698: U34.19
N$1699: U34.18
N$1700: U34.17
N$1701: U35.36
N$1702: U35.37
N$1703: U35.39
N$1704: U35.40
N$1705: U35.41
N$1706: U35.42
N$1707: U35.43
N$1708: U35.25
N$1709: U35.26
N$1710: U35.27
N$1711: U35.28
N$1712: U35.29
N$1713: U35.30
N$1714: U35.31
N$1715: U35.32
N$1716: U35.46
N$1717: U35.47
N$1718: U35.48
N$1719: U35.49
N$1720: U35.50
N$1721: U35.51
N$1722: U35.52
N$1723: U35.53
N$1724: U35.14
N$1725: U35.15
N$1726: U35.16
N$1727: U35.59
N$1728: U35.12
N$1729: U35.13
N$1730: U35.8
N$1731: U35.9
N$1732: U35.7
N$1733: U35.10
N$1734: U35.60
N$1735: U35.57
N$1736: U35.56
N$1737: U35.33
N$1738: U35.62
N$1739: U35.63
N$1740: U35.64
N$1741: U35.1
N$1742: U35.2
N$1743: U35.3
N$1744: U35.4
N$1745: U35.5
N$1746: U35.6
N$1747: U35.65
N$1748: U35.19
N$1749: U35.18
N$1750: U35.17
N$1751: U36.36
N$1752: U36.37
N$1753: U36.39
N$1754: U36.40
N$1755: U36.41
N$1756: U36.42
N$1757: U36.43
N$1758: U36.25
N$1759: U36.26
N$1760: U36.27
N$1761: U36.28
N$1762: U36.29
N$1763: U36.30
N$1764: U36.31
N$1765: U36.32
N$1766: U36.46
N$1767: U36.47
N$1768: U36.48
N$1769: U36.49
N$1770: U36.50
N$1771: U36.51
N$1772: U36.52
N$1773: U36.53
N$1774: U36.14
N$1775: U36.15
N$1776: U36.16
N$1777: U36.59
N$1778: U36.12
N$1779: U36.13
N$1780: U36.8
N$1781: U36.9
N$1782: U36.7
N$1783: U36.10
N$1784: U36.60
N$1785: U36.57
N$1786: U36.56
N$1787: U36.33
N$1788: U36.62
N$1789: U36.63
N$1790: U36.64
N$1791: U36.1
N$1792: U36.2
N$1793: U36.3
N$1794: U36.4
N$1795: U36.5
N$1796: U36.6
N$1797: U36.65
N$1798: U36.19
N$1799: U36.18
N$1800: U36.17
N$1801: U37.36
N$1802: U37.37
N$1803: U37.39
N$1804: U37.40
N$1805: U37.41
N$1806: U37.42
N$1807: U37.43
N$1808: U37.25
N$1809: U37.26
N$1810: U37.27
N$1811: U37.28
N$1812: U37.29
N$1813: U37.30
N$1814: U37.31
N$1815: U37.32
N$1816: U37.46
N$1817: U37.47
N$1818: U37.48
N$1819: U37.49
N$1820: U37.50
N$1821: U37.51
N$1822: U37.52
N$1823: U37.53
N$1824: U37.14
N$1825: U37.15
N$1826: U37.16
N$1827: U37.59
N$1828: U37.12
N$1829: U37.13
N$1830: U37.8
N$1831: U37.9
N$1832: U37.7
N$1833: U37.10
N$1834: U37.60
N$1835: U37.57
N$1836: U37.56
N$1837: U37.33
N$1838: U37.62
N$1839: U37.63
N$1840: U37.64
N$1841: U37.1
N$1842: U37.2
N$1843: U37.3
N$1844: U37.4
N$1845: U37.5
N$1846: U37.6
N$1847: U37.65
N$1848: U37.19
N$1849: U37.18
N$1850: U37.17
N$1901: U39.36
N$1902: U39.37
N$1903: U39.39
N$1904: U39.40
N$1905: U39.41
N$1906: U39.42
N$1907: U39.43
N$1908: U39.25
N$1909: U39.26
N$1910: U39.27
N$1911: U39.28
N$1912: U39.29
N$1913: U39.30
N$1914: U39.31
N$1915: U39.32
N$1916: U39.46
N$1917: U39.47
N$1918: U39.48
N$1919: U39.49
N$1920: U39.50
N$1921: U39.51
N$1922: U39.52
N$1923: U39.53
N$1924: U39.14
N$1925: U39.15
N$1926: U39.16
N$1927: U39.59
N$1928: U39.12
N$1929: U39.13
N$1930: U39.8
N$1931: U39.9
N$1932: U39.7
N$1933: U39.10
N$1934: U39.60
N$1935: U39.57
N$1936: U39.56
N$1937: U39.33
N$1938: U39.62
N$1939: U39.63
N$1940: U39.64
N$1941: U39.1
N$1942: U39.2
N$1943: U39.3
N$1944: U39.4
N$1945: U39.5
N$1946: U39.6
N$1947: U39.65
N$1948: U39.19
N$1949: U39.18
N$1950: U39.17
N$1951: U40.36
N$1952: U40.37
N$1953: U40.39
N$1954: U40.40
N$1955: U40.41
N$1956: U40.42
N$1957: U40.43
N$1958: U40.25
N$1959: U40.26
N$1960: U40.27
N$1961: U40.28
N$1962: U40.29
N$1963: U40.30
N$1964: U40.31
N$1965: U40.32
N$1966: U40.46
N$1967: U40.47
N$1968: U40.48
N$1969: U40.49
N$1970: U40.50
N$1971: U40.51
N$1972: U40.52
N$1973: U40.53
N$1974: U40.14
N$1975: U40.15
N$1976: U40.16
N$1977: U40.59
N$1978: U40.12
N$1979: U40.13
N$1980: U40.8
N$1981: U40.9
N$1982: U40.7
N$1983: U40.10
N$1984: U40.60
N$1985: U40.57
N$1986: U40.56
N$1987: U40.33
N$1988: U40.62
N$1989: U40.63
N$1990: U40.64
N$1991: U40.1
N$1992: U40.2
N$1993: U40.3
N$1994: U40.4
N$1995: U40.5
N$1996: U40.6
N$1997: U40.65
N$1998: U40.19
N$1999: U40.18
N$2000: U40.17

## Tracks (layer width: path | path; a pad name or v marks a point on that pad's centre or on a via)
S$1
  Top 0.406: 13.19,127.96 24.64,127.96 24.64,139.41 13.19,139.41 13.19,127.96
S$2
  Top 0.406: 165.59,102.56 177.04,102.56 177.04,114 165.59,114 165.59,102.56
S$3
  Top 0.406: 165.59,127.96 177.04,127.96 177.04,139.41 165.59,139.41 165.59,127.96
S$4
  Top 0.406: 38.59,140.66 50.04,140.66 50.04,152.1 38.59,152.1 38.59,140.66
S$5
  Top 0.406: 13.19,102.56 24.64,102.56 24.64,114 13.19,114 13.19,102.56
S$6
  Top 0.406: 38.59,89.85 50.04,89.85 50.04,101.31 38.59,101.31 38.59,89.85
S$7
  Top 0.406: 38.59,115.25 50.04,115.25 50.04,126.71 38.59,126.71 38.59,115.25
S$8
  Top 0.406: 63.99,102.56 75.44,102.56 75.44,114 63.99,114 63.99,102.56
S$9
  Top 0.406: 63.99,127.96 75.44,127.96 75.44,139.41 63.99,139.41 63.99,127.96
S$10
  Top 0.406: 89.39,115.25 100.84,115.25 100.84,126.71 89.39,126.71 89.39,115.25
S$11
  Top 0.406: 89.39,140.66 100.84,140.66 100.84,152.1 89.39,152.1 89.39,140.66
S$12
  Top 0.406: 114.79,127.96 126.24,127.96 126.24,139.41 114.79,139.41 114.79,127.96
S$13
  Top 0.406: 89.39,89.85 100.84,89.85 100.84,101.31 89.39,101.31 89.39,89.85
S$14
  Top 0.406: 114.79,77.16 126.24,77.16 126.24,88.6 114.79,88.6 114.79,77.16
S$15
  Top 0.406: 114.79,102.56 126.24,102.56 126.24,114 114.79,114 114.79,102.56
S$16
  Top 0.406: 140.19,89.85 151.64,89.85 151.64,101.31 140.19,101.31 140.19,89.85
S$17
  Top 0.406: 38.59,64.45 50.04,64.45 50.04,75.91 38.59,75.91 38.59,64.45
S$18
  Top 0.406: 63.99,51.75 75.44,51.75 75.44,63.2 63.99,63.2 63.99,51.75
S$19
  Top 0.406: 63.99,77.16 75.44,77.16 75.44,88.6 63.99,88.6 63.99,77.16
S$20
  Top 0.406: 89.39,64.45 100.84,64.45 100.84,75.91 89.39,75.91 89.39,64.45
S$21
  Top 0.406: 63.99,26.35 75.44,26.35 75.44,37.8 63.99,37.8 63.99,26.35
S$22
  Top 0.406: 89.39,13.65 100.84,13.65 100.84,25.1 89.39,25.1 89.39,13.65
S$23
  Top 0.406: 89.39,39.05 100.84,39.05 100.84,50.5 89.39,50.5 89.39,39.05
S$24
  Top 0.406: 114.79,26.35 126.24,26.35 126.24,37.8 114.79,37.8 114.79,26.35
S$25
  Top 0.406: 114.79,51.75 126.24,51.75 126.24,63.2 114.79,63.2 114.79,51.75
S$26
  Top 0.406: 140.19,39.05 151.64,39.05 151.64,50.5 140.19,50.5 140.19,39.05
S$27
  Top 0.406: 140.19,64.45 151.64,64.45 151.64,75.91 140.19,75.91 140.19,64.45
S$28
  Top 0.406: 165.59,51.75 177.04,51.75 177.04,63.2 165.59,63.2 165.59,51.75
S$29
  Top 0.406: 140.19,13.65 151.64,13.65 151.64,25.1 140.19,25.1 140.19,13.65
S$30
  Bottom 0.203: 10.92,154.18 14.48,154.18 14.48,150.62 10.92,150.62 10.92,154.18
S$31
  Top 0.406: 165.59,26.35 177.04,26.35 177.04,37.8 165.59,37.8 165.59,26.35
S$32
  Top 0.406: 165.59,77.16 177.04,77.16 177.04,88.6 165.59,88.6 165.59,77.16
S$33
  Top 0.406: 13.19,51.75 24.64,51.75 24.64,63.2 13.19,63.2 13.19,51.75
S$34
  Top 0.406: 13.19,77.16 24.64,77.16 24.64,88.6 13.19,88.6 13.19,77.16
S$35
  Bottom 0.203: 33.78,154.18 37.34,154.18 37.34,150.62 33.78,150.62 33.78,154.18
S$36
  Top 0.406: 13.19,26.35 24.64,26.35 24.64,37.8 13.19,37.8 13.19,26.35
S$37
  Top 0.406: 38.59,13.65 50.04,13.65 50.04,25.1 38.59,25.1 38.59,13.65
S$38
  Top 0.406: 38.59,39.05 50.04,39.05 50.04,50.5 38.59,50.5 38.59,39.05
S$39
  Top 0.406: 140.19,140.66 151.64,140.66 151.64,152.1 140.19,152.1 140.19,140.66
S$40
  Top 0.406: 140.19,115.25 151.64,115.25 151.64,126.71 140.19,126.71 140.19,115.25
S$41
  Bottom 0.203: 10.92,131.32 14.48,131.32 14.48,127.76 10.92,127.76 10.92,131.32
S$42
  Bottom 0.203: 33.78,131.32 37.34,131.32 37.34,127.76 33.78,127.76 33.78,131.32
S$43
  Bottom 0.203: 56.64,154.18 60.2,154.18 60.2,150.62 56.64,150.62 56.64,154.18
S$44
  Bottom 0.203: 79.5,154.18 83.06,154.18 83.06,150.62 79.5,150.62 79.5,154.18
S$45
  Bottom 0.203: 56.64,131.32 60.2,131.32 60.2,127.76 56.64,127.76 56.64,131.32
S$46
  Bottom 0.203: 79.5,131.32 83.06,131.32 83.06,127.76 79.5,127.76 79.5,131.32
S$47
  Bottom 0.203: 102.36,154.18 105.92,154.18 105.92,150.62 102.36,150.62 102.36,154.18
S$48
  Bottom 0.203: 125.22,154.18 128.78,154.18 128.78,150.62 125.22,150.62 125.22,154.18
S$49
  Bottom 0.203: 102.36,131.32 105.92,131.32 105.92,127.76 102.36,127.76 102.36,131.32
S$50
  Bottom 0.203: 125.22,131.32 128.78,131.32 128.78,127.76 125.22,127.76 125.22,131.32
S$51
  Bottom 0.203: 148.08,154.18 151.64,154.18 151.64,150.62 148.08,150.62 148.08,154.18
S$52
  Bottom 0.203: 170.94,154.18 174.5,154.18 174.5,150.62 170.94,150.62 170.94,154.18
S$53
  Bottom 0.203: 148.08,131.32 151.64,131.32 151.64,127.76 148.08,127.76 148.08,131.32
S$54
  Bottom 0.203: 170.94,131.32 174.5,131.32 174.5,127.76 170.94,127.76 170.94,131.32
S$55
  Bottom 0.203: 10.92,108.46 14.48,108.46 14.48,104.9 10.92,104.9 10.92,108.46
S$56
  Bottom 0.203: 33.78,108.46 37.34,108.46 37.34,104.9 33.78,104.9 33.78,108.46
S$57
  Bottom 0.203: 10.92,85.6 14.48,85.6 14.48,82.04 10.92,82.04 10.92,85.6
S$58
  Bottom 0.203: 33.78,85.6 37.34,85.6 37.34,82.04 33.78,82.04 33.78,85.6
S$59
  Bottom 0.203: 56.64,108.46 60.2,108.46 60.2,104.9 56.64,104.9 56.64,108.46
S$60
  Bottom 0.203: 79.5,108.46 83.06,108.46 83.06,104.9 79.5,104.9 79.5,108.46
S$61
  Bottom 0.203: 56.64,85.6 60.2,85.6 60.2,82.04 56.64,82.04 56.64,85.6
S$62
  Bottom 0.203: 79.5,85.6 83.06,85.6 83.06,82.04 79.5,82.04 79.5,85.6
S$63
  Bottom 0.203: 102.36,108.46 105.92,108.46 105.92,104.9 102.36,104.9 102.36,108.46
S$64
  Bottom 0.203: 125.22,108.46 128.78,108.46 128.78,104.9 125.22,104.9 125.22,108.46
S$65
  Bottom 0.203: 102.36,85.6 105.92,85.6 105.92,82.04 102.36,82.04 102.36,85.6
S$66
  Bottom 0.203: 125.22,85.6 128.78,85.6 128.78,82.04 125.22,82.04 125.22,85.6
S$67
  Bottom 0.203: 148.08,108.46 151.64,108.46 151.64,104.9 148.08,104.9 148.08,108.46
S$68
  Bottom 0.203: 170.94,108.46 174.5,108.46 174.5,104.9 170.94,104.9 170.94,108.46
S$69
  Bottom 0.203: 148.08,85.6 151.64,85.6 151.64,82.04 148.08,82.04 148.08,85.6
S$70
  Bottom 0.203: 170.94,85.6 174.5,85.6 174.5,82.04 170.94,82.04 170.94,85.6
S$71
  Bottom 0.203: 10.92,62.74 14.48,62.74 14.48,59.18 10.92,59.18 10.92,62.74
S$72
  Bottom 0.203: 33.78,62.74 37.34,62.74 37.34,59.18 33.78,59.18 33.78,62.74
S$73
  Bottom 0.203: 56.64,62.74 60.2,62.74 60.2,59.18 56.64,59.18 56.64,62.74
S$74
  Bottom 0.203: 79.5,62.74 83.06,62.74 83.06,59.18 79.5,59.18 79.5,62.74
S$75
  Bottom 0.203: 102.36,62.74 105.92,62.74 105.92,59.18 102.36,59.18 102.36,62.74
S$76
  Bottom 0.203: 125.22,62.74 128.78,62.74 128.78,59.18 125.22,59.18 125.22,62.74
S$77
  Bottom 0.203: 148.08,62.74 151.64,62.74 151.64,59.18 148.08,59.18 148.08,62.74
S$78
  Bottom 0.203: 170.94,62.74 174.5,62.74 174.5,59.18 170.94,59.18 170.94,62.74
S$79
  Bottom 0.203: 10.92,39.88 14.48,39.88 14.48,36.32 10.92,36.32 10.92,39.88
S$80
  Bottom 0.203: 33.78,39.88 37.34,39.88 37.34,36.32 33.78,36.32 33.78,39.88
S$81
  Bottom 0.203: 10.92,17.02 14.48,17.02 14.48,13.46 10.92,13.46 10.92,17.02
S$82
  Bottom 0.203: 33.78,17.02 37.34,17.02 37.34,13.46 33.78,13.46 33.78,17.02
S$83
  Bottom 0.203: 56.64,39.88 60.2,39.88 60.2,36.32 56.64,36.32 56.64,39.88
S$84
  Bottom 0.203: 79.5,39.88 83.06,39.88 83.06,36.32 79.5,36.32 79.5,39.88
S$85
  Bottom 0.203: 56.64,17.02 60.2,17.02 60.2,13.46 56.64,13.46 56.64,17.02
S$86
  Bottom 0.203: 79.5,17.02 83.06,17.02 83.06,13.46 79.5,13.46 79.5,17.02
S$87
  Bottom 0.203: 102.36,39.88 105.92,39.88 105.92,36.32 102.36,36.32 102.36,39.88
S$88
  Bottom 0.203: 125.22,39.88 128.78,39.88 128.78,36.32 125.22,36.32 125.22,39.88
S$89
  Bottom 0.203: 102.36,17.02 105.92,17.02 105.92,13.46 102.36,13.46 102.36,17.02
S$90
  Bottom 0.203: 125.22,17.02 128.78,17.02 128.78,13.46 125.22,13.46 125.22,17.02
S$91
  Bottom 0.203: 148.08,39.88 151.64,39.88 151.64,36.32 148.08,36.32 148.08,39.88
S$92
  Bottom 0.203: 170.94,39.88 174.5,39.88 174.5,36.32 170.94,36.32 170.94,39.88
S$93
  Bottom 0.203: 148.08,17.02 151.64,17.02 151.64,13.46 148.08,13.46 148.08,17.02
S$94
  Bottom 0.203: 170.94,17.02 174.5,17.02 174.5,13.46 170.94,13.46 170.94,17.02